# Altium PCB 110-00315-D_B1-DevKit.PcbDoc (part 5 of 9)
Units mil, origin at the board's own origin, x right, y up, seen from the top; angles counter-clockwise.
Board outline 5199.57 x 2702 mil, 8 copper layers (Top Layer, Layer 2-GND-Plane, Layer 3, Layer 4, Layer 5, Layer 6, Layer 7-PWR-Plane, Bottom Layer), stack 60.866 mil thick; 418 components, 298 nets, 1591 pads, 1631 vias.
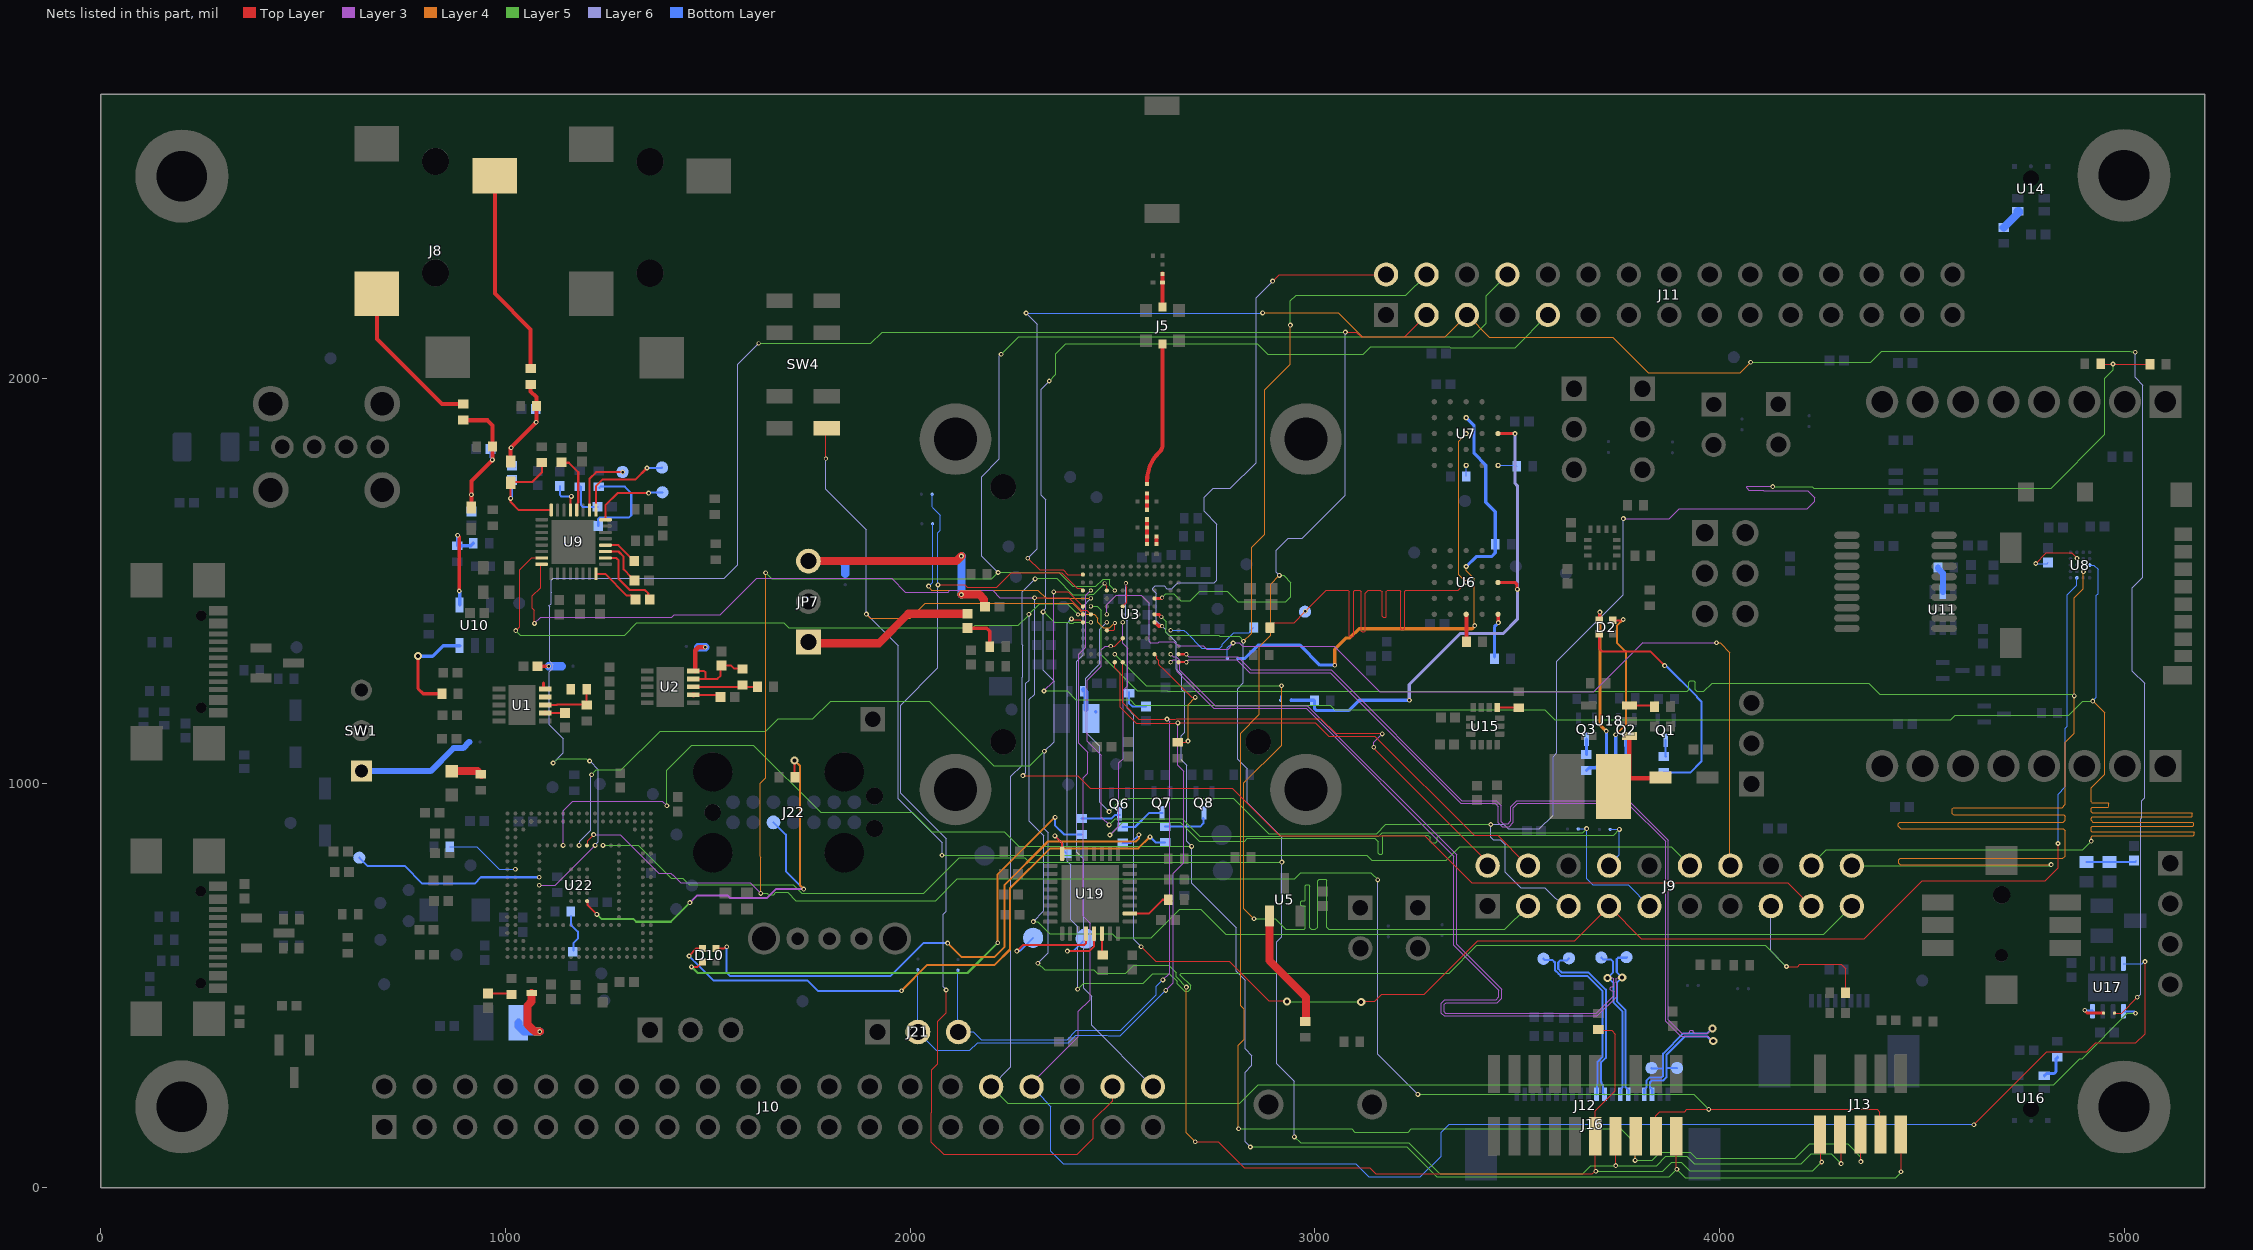
[diagram p10: the nets of this part, all layers, seen from the top]

## Via types
v1: diameter 20, hole 10, Top Layer to Bottom Layer, tented both sides, 773 vias
v2: diameter 12, hole 6, Top Layer to Bottom Layer, tented both sides, 549 vias
v3: diameter 12, hole 6, Top Layer to Bottom Layer, 194 vias
v4: diameter 10, hole 6, Top Layer to Bottom Layer, 101 vias
v5: diameter 10, hole 6, Top Layer to Bottom Layer, tented both sides, 10 vias
v6: diameter 15, hole 8, Top Layer to Bottom Layer, 4 vias

## Nets (pads, with @x,y where several pads share a name; then routed paths per layer and width w, separated by ;. In a path a pad name is that pad's centre, name@x,y a point inside that pad or via, vN(x,y) a via of type N, cw(c..) or ccw(c..) an arc to the next point about the centre after c; other vN are vias at no path point) (continued)
LINE_IN_R: C72.1 C74.2 R45.1 U9.24 | length 316.5
  Top Layer w5: C74.2@1007.58,1742.8 1012.58,1737.8 v2(1012.58,1703.8) 1012.58,1694.8 1032.63,1674.74 U9.24@1112.89,1674.74 ; C74.2@1011.58,1744.8 1066.58,1744.8 1089.58,1767.8 R45.1@1089.58,1792.11
  Bottom Layer w5: v2@1011.58,1704.8 1011.68,1704.8 1015.58,1708.69 C72.1@1015.58,1749.08
LINE_OUT_FB: TP31.1 U9.17 | length 239.3
  Top Layer w5: U9.17@1223.12,1674.74 1223.12,1733.34 1240.58,1750.8 1321.58,1750.8 v2(1349.58,1778.8)
  Bottom Layer w5: v2@1351.58,1778.8 1352.08,1779.3 1386.08,1779.3 TP31.1@1386.58,1779.8
LINE_OUT_L: TP30.1 U9.16 | length 190.9
  Top Layer w5: U9.16@1246.74,1651.12 1246.74,1686.96 1276.58,1716.8 v2(1353.58,1716.8)
  Bottom Layer w5: v2@1352.58,1716.8 1353.58,1717.8 1386.58,1717.8 TP30.1@1387.58,1718.8
LINE_OUT_R: TP29.1 U9.18 | length 166.8
  Top Layer w5: U9.18@1207.37,1674.74 1207.37,1752.59 1223.58,1768.8 v2(1289.58,1768.8)
LINEIN_L: J8.2 R42.1 | length 360.1
  Top Layer w10: J8.2@682.58,2178.8 682.58,2097.75 843.33,1937 R42.1@895,1937
LINEIN_R: J8.3 R43.1 | length 507.7
  Top Layer w10: J8.3@973.58,2495.8 973.58,2209.8 1062,2121.37 R43.1@1062,2024.69
MIPI_DSI_0_N: J16.18 TP34.1 U3.A13 | length 2386.9
  Top Layer w5: U3.A13@2663.06,1298.95 U3.A13@2663.06,1298.95 2682.5,1298.87 v5(2682.58,1298.8)
  Layer 3 w3: v5(2682.58,1298.8) 2688.92,1305.14 2806.41,1305.14 2838.75,1272.8 3037.58,1272.8 3360.58,949.8 3445.53,949.8 3453.53,941.8 3453.53,901.8 3462.63,892.7 3480.43,892.7 3490.53,902.8 3490.53,938.8 3501.53,949.8 3772.58,949.8 3866.58,855.8 3866.58,411.9 3903.68,374.8 3971.58,374.8 3983.58,362.8 v1(3984.58,362.8)
  Bottom Layer w5: J16.18@3833.59,242 3828.25,247.34 3828.25,260.28 3832.77,264.8 3860.38,264.8 3868.58,273 ; TP34.1@3895,296 3894.8,295.8 3869.58,295.8 3869.58,274 3868.58,273 ; v1@3980.79,362.8 3969.79,373.8 3914.16,373.8 3868.58,328.21 3868.58,273
  Bottom Layer w6: J16.18@3833.59,231 J16.18@3833.59,242 ; v1@3980.79,362.8 v1(3984.58,362.8)
MIPI_DSI_0_P: J16.17 TP35.1 U3.A12 | length 2386
  Top Layer w5: U3.A12@2663.06,1318.63 U3.A12@2663.06,1318.63 2682.5,1318.56 v5(2682.58,1318.48)
  Layer 3 w3: v5(2682.58,1318.48) 2688.92,1312.14 2809.31,1312.14 2841.65,1279.8 3040.48,1279.8 3363.48,956.8 3448.43,956.8 3460.53,944.7 3460.53,904.8 ; 3460.53,904.7 3465.53,899.7 3477.53,899.7 3483.09,905.25 ; 3483.53,905.7 3483.53,941.7 3498.63,956.8 3775.48,956.8 3873.58,858.7 3873.58,414.8 3906.58,381.8 3925.53,381.8 ; 3925.53,382.8 3926.53,383.8 3926.53,387.04 3928.29,388.8 3933.53,388.8 3935.53,386.8 3935.53,383.8 3937.53,381.8 3971.58,381.8 3982.58,392.8 v1(3982.58,393.8)
  Bottom Layer w5: J16.17@3813.91,242 3819.25,247.34 3819.25,264.01 3828.04,272.8 3857.06,272.8 3860.58,276.31 3860.58,294.8 ; TP35.1@3832,296 3833.21,294.8 3860.58,294.8 ; v1@3981.58,393.8 3969.58,381.8 3910.85,381.8 3860.58,331.52 3860.58,294.8
  Bottom Layer w6: J16.17@3813.91,231 J16.17@3813.91,242
MIPI_DSI_1_N: J16.12 TP38.1 | length 452.5
  Bottom Layer w5: TP38.1@3628,567 3623.22,562.22 3606.95,562.22 3601.53,556.8 3601.53,541.04 3608.19,534.38 3610.77,531.8 3676.6,531.8 3719,489.4 3719,321.02 3706.64,308.66 3706.64,262.61 3708.14,261.11 3708.14,257.8 3711.98,253.95 3711.98,234.5 J16.12@3715.48,231
MIPI_DSI_1_P: J16.11 TP39.1 | length 451.6
  Bottom Layer w5: TP39.1@3565,566 3568.18,562.82 3587.5,562.82 3593.53,556.8 3593.53,537.73 3602.53,528.73 3607.46,523.8 3673.29,523.8 3711,486.09 3711,324.33 3698.64,311.98 3698.64,256.3 3697.85,255.5 3697.85,233.05 J16.11@3695.8,231
MIPI_DSI_C_N: J16.15 TP36.1 U3.B13 | length 2386
  Layer 3 w3: v4(2643.37,1298.95) 2649.72,1305.29 2654.58,1305.29 2659.58,1300.29 2659.58,1275.9 2750.68,1184.8 2978.58,1184.8 3343.53,819.84 3343.53,598.94 3454.63,487.85 3454.63,471.75 3447.68,464.8 3321.29,464.8 3312.58,456.08 3312.58,431.9 3319.68,424.8 3698.48,424.8 3745.58,471.9 3745.58,506.7 3745.08,507.2 3745.08,517.54 3746.84,519.3 3759.08,519.3 v1(3759.58,519.8)
  Bottom Layer w5: TP36.1@3771.58,569.8 3770.25,568.47 3749.59,568.47 3746.08,564.96 3746.08,532.8 3759.08,519.8 v1(3759.58,519.8) 3746.58,506.8 3746.58,460.73 3768.2,439.11 3768.2,248.34 3774.54,242 J16.15@3774.54,231
MIPI_DSI_C_P: J16.14 TP37.1 U3.B12 | length 2386.1
  Layer 3 w3: v4(2643.37,1318.63) 2649.72,1312.29 2657.48,1312.29 2666.58,1303.19 2666.58,1278.8 2753.58,1191.8 2981.48,1191.8 3350.53,822.74 3350.53,601.84 3461.63,490.75 3461.63,468.85 3450.58,457.8 3324.19,457.8 3319.58,453.18 3319.58,434.8 3322.58,431.8 3695.58,431.8 3738.58,474.8 3738.58,484.8 3736.58,486.8 3733.58,486.8 3730.58,489.8 3730.58,494.8 3732.58,496.8 3736.58,496.8 3738.58,498.8 3738.58,503.8 3738.08,504.3 3738.08,517.54 3736.32,519.3 3724.08,519.3 v1(3723.58,518.8)
  Bottom Layer w5: TP37.1@3708,569 3712.6,564.41 3731.47,564.41 3737.08,558.8 3737.08,532.8 3723.58,519.3 v1(3723.58,518.8) 3725.58,518.8 3737.58,506.8 3737.58,458.41 3760.2,435.8 3760.2,247.34 3754.85,242 J16.14@3754.85,231
NetC4_2: C4.2 R1.2 S1.1 U1.9 U1.10 | length 80
  Top Layer w8: C4.2@1079.3,1288.8 1105.58,1288.8 v2@1106.58,1289.8 ; 1093.58,1247.8 1093.58,1234.28 1095.48,1232.37 U1.10@1098.09,1232.37
  Bottom Layer w8: S1.1@1139.8,1288.8 S1.1@1140,1289
  Bottom Layer w20: v2(1106.58,1288.8) S1.1@1139.8,1288.8
NetC5_2: C5.2 U1.7 | length 49.7
  Top Layer w5: U1.7@1098.19,1173.22 C5.2@1147.15,1173.22
  Top Layer w12: U1.7@1098.09,1173.32 U1.7@1098.19,1173.22 ; C5.2@1147.15,1173.22 C5.2@1147.58,1172.8
NetC10_2: C10.2 R3.2 S2.1 U2.9 U2.10 | length 303.3
  Top Layer w5: U2.9@1464.09,1257.69 1493.78,1257.69 ; U2.10@1468.48,1277.37 1490.23,1277.37 1493.5,1274.1 1493.5,1257.97 1493.78,1257.69 ; C10.2@1531.58,1289.8 1531.58,1265.8 1523.47,1257.69 1493.78,1257.69 ; C10.2@1533.58,1290.36 1557.24,1290.36 1564.12,1283.48 R3.2@1585.5,1283.48
  Top Layer w12: U2.10@1468.48,1277.37 1468.58,1277.47 1468.58,1327.8 1476.58,1335.8 v2(1493.58,1335.8) ; C10.2@1528.58,1294.8 1531.58,1291.8 C10.2@1531.58,1289.8 ; C10.2@1529.58,1289.8 C10.2@1531.58,1289.8 ; C10.2@1534.15,1289.8 C10.2@1531.58,1289.8
  Bottom Layer w12: S2.1@1473.3,1338 S2.1@1475.51,1335.8
  Bottom Layer w20: S2.1@1475.51,1335.8 v2(1493.58,1335.8)
NetC11_2: C11.2 U2.7 | length 60.5
  Top Layer w5: U2.7@1464.19,1218.22 1521.15,1218.22 C11.2@1523.58,1215.8
  Top Layer w12: U2.7@1464.09,1218.32 U2.7@1464.19,1218.22
NetC31_2: C31.2 R22.1 | length 72.4
  Bottom Layer w5: R22.1@2540.53,1224.8 2540.53,1197.8 2548.82,1189.51 C31.2@2582.53,1189.51
NetC32_1: C32.1 JP7.1 | length 413.9
  Top Layer w20: JP7.1@1755.58,1345.8 1922.53,1345.8 1995.25,1418.51 C32.1@2139.33,1418.51
NetC32_2: C32.2 R23.1 | length 97.3
  Top Layer w8: C32.2@2141.53,1383.08 2189.53,1383.08 2196.85,1375.77 R23.1@2196.85,1336.8
NetC33_1: C33.1 JP7.3 SH7.1 | length 672.8
  Top Layer w20: JP7.3@1757.53,1555.8 1764.53,1548.8 2114.15,1548.8 v2(2126.34,1560.98) ; v2(2126.53,1465.8) 2170.89,1465.8 2182.61,1454.08 2182.61,1438 C33.1@2184.82,1435.8
  Bottom Layer w20: JP7.3@1745.53,1548.8 JP7.3@1748.58,1548.8 1830.7,1548.8 1839.53,1539.97 SH7.1@1839.53,1517.1 ; v2(2126.53,1465.8) 2126.53,1559.8 v2@2127.5,1560.77
NetC37_1: C37.1 C39.2 L3.1 R52.2 | length 57.6
  Top Layer w10: C39.2@2584.99,1631.4 2585.19,1631.2 C37.1@2585.19,1590.79 ; C39.2@2585.07,1634.82 2585.07,1647.82 2585.2,1647.95 L3.1@2585.2,1651.66
NetC38_1: C38.1 R52.1 | length 18.2
  Top Layer w10: C38.1@2608.5,1590.5 R52.1@2608.5,1608.69
NetC40_2: C40.2 L3.2 L4.1 | length 35.7
  Top Layer w10: L3.2@2585.19,1679.62 C40.2@2585.19,1696 ; C40.2@2585.3,1696.52 L4.1@2585.3,1715.8
NetC41_1: C41.1 J5.OUT L5.2 | length 83.7
  Top Layer w10: J5.OUT@2623.53,2176.47 2623.53,2236.61 2623.34,2236.8 2623.53,2236.99 L5.2@2623.53,2259.99
NetC54_2: C54.2 U8.B3 | length 149.6
  Top Layer w3: v2(4781.58,1542.8) 4807.58,1568.8 4870.58,1568.8 v2(4883.58,1555.8)
  Bottom Layer w3: v2(4781.58,1542.8) 4809.52,1542.8 C54.2@4812,1545.29
NetC56_2: C56.2 R38.2 | length 244.8
  Bottom Layer w5: C56.2@1229.03,1635.37 1229.03,1653.25 1232.58,1656.8 1305.58,1656.8 1310.58,1661.8 1310.58,1716.8 1294.58,1732.8 1234.58,1732.8 R38.2@1231.58,1729.8
NetC57_2: C57.2 R39.2 | length 88.7
  Bottom Layer w5: R39.2@1185.58,1732.8 1186.58,1731.8 1186.58,1686.8 1190.37,1683 C57.2@1227.29,1683
NetC59_1: C59.1 U9.10 | length 181.6
  Top Layer w5: U9.10@1246.74,1556.63 1273.74,1556.63 1276.56,1553.81 1278.58,1551.8 1278.58,1505.8 1307.58,1476.8 1344.58,1476.8 1352.58,1468.8 1352.58,1457.8 C59.1@1353.58,1456.8
NetC59_2: C59.2 U9.8 | length 126.3
  Top Layer w5: U9.8@1223.12,1517.26 1246.11,1517.26 1299.87,1463.5 1311.16,1463.5 C59.2@1320.86,1453.8 1321.58,1453.08 C59.2@1321.58,1451.8
NetC65_2: C65.2 U9.21 | length 89.9
  Top Layer w5: U9.21@1160.13,1674.74 1160.13,1706.35 v2(1162.58,1708.8)
  Bottom Layer w5: C65.2@1134,1734.29 1134,1712.37 1137.58,1708.8 v2(1162.58,1708.8) v2@1164.58,1710.8
NetC66_2: C66.2 U9.20 | length 142.1
  Top Layer w5: C66.2@1142.58,1791.8 1156.58,1791.8 1179.58,1768.8 1179.58,1693.8 1177.32,1691.53 1177.32,1676.18 U9.20@1175.88,1674.74
NetC67_2: C67.2 U9.11 | length 113.9
  Top Layer w5: U9.11@1246.74,1572.38 1279,1572.38 1291.58,1559.8 1291.58,1528.08 1310.58,1509.08 C67.2@1310.58,1503.8
NetC68_2: C68.2 U9.12 | length 89.7
  Top Layer w5: U9.12@1246.74,1588.13 1278.53,1588.13 C68.2@1317.86,1548.8 1318.58,1548.08 C68.2@1318.58,1546.8
NetC69_1: C69.1 C70.2 C71.2 R41.1 R42.2 | length 370.4
  Top Layer w5: C69.1@915,1681 C69.1@915.58,1681.58 ; v2@966.58,1797.8 v2@967.58,1797.8 ; R41.1@967.58,1831.58 R41.1@968,1832
  Top Layer w10: R42.2@898.58,1896.8 955.58,1896.8 968,1884.37 R41.1@968,1832 ; C69.1@915.58,1681.58 v2(915.58,1712.8) 915.58,1746.8 v2@966.58,1797.8 ; v2(967.58,1798.8) R41.1@967.58,1831.58
  Bottom Layer w5: v2(915.58,1712.8) 916,1712.37 C71.2@916,1671.72 ; C70.2@962.72,1826 962.72,1805.55 968.58,1799.69 v2@968.58,1798.8
NetC72_2: C72.2 C73.2 C74.1 R43.2 R44.1 | length 299.8
  Top Layer w5: v2(1075.58,1891.8) v2@1076.58,1892.8
  Top Layer w10: C74.1@1012.58,1795.3 1012.58,1828.8 v2(1075.58,1891.8) ; R43.2@1062,1985.32 1062,1968.37 1076.58,1953.8 R44.1@1076.58,1933.8 ; v2@1076.58,1892.8 R44.1@1076.58,1931.8
  Bottom Layer w5: v2@1013.58,1829.8 v2(1013.58,1828.8) 1013.58,1786.51 C72.2@1015.58,1784.51 ; C73.2@1074.44,1925 1075.58,1923.86 1075.58,1893.8 v2@1074.58,1892.8
NetC95_2: C95.2 R56.1 R57.1 | length 123.7
  Bottom Layer w5: R57.1@4907,805 5026.78,805 C95.2@5029.58,807.8
NetC106_2: C106.2 U19.16 | length 106.7
  Top Layer w5: v2(2357.58,869.8) 2375.68,851.69 U19.16@2375.68,825.3
  Bottom Layer w5: v2(2357.58,869.8) 2376.16,851.22 2376.16,836.5 C106.2@2385.86,826.8
NetC137_2: C137.2 R85.1 | length 96.7
  Bottom Layer w5: R85.1@1161.26,671.8 1161.26,650.11 1178.58,632.8 1178.58,615.8 1167.58,604.8 C137.2@1167.58,586.8
NetC141_2: C141.2 R86.1 | length 59.1
  Top Layer w5: C141.2@956.53,480.51 1011.82,480.51 R86.1@1014.53,477.8
NetD2_2: D2.2 R7.2 | length 599.8
  Top Layer w5: D2.2@3702.85,1369.06 3702.85,1332.53 3709.58,1325.8 3828.87,1325.8 v2(3864.22,1290.44) 3865.58,1289.09 v2@3865.58,1288.8
  Bottom Layer w5: R7.2@3862,1026.32 3887.06,1026.32 3887.58,1025.8 3927.58,1025.8 3955.58,1053.8 3955.58,1200.8 3944.79,1211.59 3944.79,1213.51 3866.5,1291.8 v2@3864.58,1291.8
NetD2_3: D2.3 R12.2 | length 448.9
  Top Layer w8: D2.3@3702.85,1402.53 3703.77,1403.45 3703.77,1422.03 v2(3704.53,1422.8)
  Layer 4 w8: v2(3704.53,1422.8) 3704.53,1144.13 v2(3720.22,1128.44)
  Bottom Layer w8: R12.2@3671,1031.32 3677.83,1038.14 3693.93,1038.14 3720.58,1064.8 v2@3720.58,1128.44
NetD2_4: D2.4 R10.1 | length 474.6
  Top Layer w5: D2.4@3736.31,1402.53 3759.31,1402.53 v2@3760.58,1403.8
  Layer 4 w5: v2(3743.22,1119.44) 3768.53,1144.75 3768.53,1324.8 3746.56,1346.77 3746.56,1388.77 v2(3762.22,1404.44)
  Bottom Layer w8: v2@3743.58,1119.8 3743.58,1052.8 3733.58,1042.8 3733.58,1025.8 3743.58,1015.8 3763.17,1015.8 R10.1@3768,1020.63
NetD6_A: D6.A R14.2 | length 77.6
  Top Layer w20: D6.A@867,1029.53 930.85,1029.53 R14.2@940.58,1019.8
NetD9_2: D9.2 L6.2 U18.1 | length 182.5
  Top Layer w8: U18.1@3777,1116.35 U18.1@3777.25,1116.6 ; D9.2@3852,1012 D9.2@3854,1014
  Top Layer w12: U18.1@3777,1116.35 3777,1012 D9.2@3852,1012
NetD10_2: D10.2 R93.2 | length 1292.4
  Top Layer w5: v2(1459.53,545.8) 1474.53,545.8 D10.2@1486.8,558.06
  Layer 5 w5: v2(1459.53,545.8) 1474.53,530.8 2141.58,530.8 v2@2216.53,605.75
  Layer 4 w5: v2(2216.22,605.44) 2216.22,774.44 2357.58,915.8 v2@2358.58,915.8
  Bottom Layer w5: v2@2356.58,915.8 2358.22,914.15 2358.22,895.15 2380.26,873.11 R93.2@2423.58,873.11
  other v2: 2358.22,915.44
NetD10_3: D10.3 R96.2 | length 1508
  Top Layer w5: v2@1453.53,573.8 1471.26,591.53 D10.3@1486.8,591.53
  Layer 4 w5: v2(1978.53,486.8) 2042.53,550.8 2208.58,550.8 2246.58,588.8 2246.58,739.8 2345.58,838.8 2564.03,838.8 v2(2592.53,867.3)
  Bottom Layer w5: v2@1452.53,575.8 1452.53,573.8 1514.53,511.8 1746.53,511.8 1771.53,486.8 v2(1978.53,486.8) ; v2(2592.53,867.3) 2606.51,853.32 R96.2@2630,853.32
  other v2: 1453.53,572.8
NetD10_4: D10.4 R94.2 | length 1435.6
  Top Layer w5: D10.4@1520.26,591.53 1540.37,591.53 1546.64,597.8 v2@1547.53,597.8
  Layer 4 w5: v2(2092.53,604.8) 2127.53,569.8 2207.58,569.8 2232.58,594.8 2232.58,747.8 2340.58,855.8 2557.58,855.8 2565.58,863.8 v2@2565.58,872.8
  Bottom Layer w5: v2(1546.53,595.8) 1546.53,531.8 1555.53,522.8 1950.24,522.8 2032.24,604.8 v2(2092.53,604.8) ; R94.2@2525,852.32 2545.3,852.32 2565.78,872.8 v2@2566.58,872.8
  other v2: 2565.22,872.44
NetJ5_IN: J5.IN L4.2 | length 356.3
  Top Layer w10: L4.2@2585.3,1739.42 2585.3,1746.48 cw(c2685.3,1746.48) 2614.59,1817.19 2617,1819.6 ccw(c2601.23,1835.37) 2623.53,1835.37 J5.IN@2623.53,2085.13
NetL1_2: L1.2 L2.1 | length 53.1
  Bottom Layer w8: L2.1@2458,1176.37 L2.1@2458.58,1175.8
  Bottom Layer w12: L1.2@2428.21,1231.47 2434.58,1225.1 L2.1@2434.58,1181.8
NetL7_2: L7.2 L8.1 | length 186
  Top Layer w20: L7.2@1064.53,481.56 1064.1,481.12 1064.1,460.23 1059.53,455.67 1059.53,454.8 1054.53,449.8 1054.53,403.8 1065.56,392.77 1072.53,385.8 v3(1084.53,385.8)
  Bottom Layer w20: L8.1@1031.45,407.8 1031.45,400.21 1045.85,385.8 v3(1084.53,385.8)
NetQ1_3: Q1.3 R7.1 | length 40.9
  Bottom Layer w5: Q1.3@3867,1106.43 3867,1066.37 R7.1@3867.58,1065.8
NetQ2_3: Q2.3 R10.2 | length 47.5
  Bottom Layer w8: R10.2@3768,1060 3769.69,1061.69 Q2.3@3769.69,1106.85
NetQ3_3: Q3.3 R12.1 | length 37.7
  Bottom Layer w8: R12.1@3671,1070.69 Q3.3@3671,1108.43
NetQ6_3: Q6.3 R93.1 | length 98.4
  Bottom Layer w5: R93.1@2423.58,912.48 2497.26,912.48 2505.58,920.8 Q6.3@2518.58,920.8
NetQ7_3: Q7.3 R94.1 | length 113.1
  Bottom Layer w5: R94.1@2525,891.69 2555.47,891.69 2590.58,926.8 Q7.3@2623.58,926.8
NetQ8_3: Q8.3 R96.1 | length 111.3
  Bottom Layer w5: R96.1@2630,892.69 2716.47,892.69 2724.58,900.8 2724.58,912.8 Q8.3@2723.58,913.8
NetR1_1: R1.1 R2.2 U1.8 | length 137.6
  Top Layer w5: U1.8@1098.09,1193 1125.78,1193 1127.58,1194.8 R2.2@1198.58,1194.8 ; R2.2@1200.37,1197.83 R1.1@1200.37,1232
  Top Layer w12: R2.2@1198.58,1196.8 1199.34,1196.8 R2.2@1200.37,1197.83
NetR3_1: R3.1 R4.2 U2.8 | length 158.6
  Top Layer w5: U2.8@1464.09,1238 R4.2@1622.69,1238
NetR16_2: R16.2 U5.1 | length 296.9
  Top Layer w20: U5.1@2888.13,671.8 2888.13,561.2 2978.53,470.8 2978.53,413.8 R16.2@2977.53,412.8
NetR27_2: R27.2 U3.B9 | length 252
  Bottom Layer w3: v4@2641.58,1377.8 2641.69,1377.69 v4(2643.37,1377.69) ; v4@2643.58,1375.8 2645.58,1377.8 2676.58,1377.8 2683.06,1371.32 ; 2682.8,1371.06 2721.06,1332.8 2765.05,1332.8 2771.7,1339.45 2771.7,1343.3 2799.59,1371.19 2837.81,1371.19 2839.57,1372.94 2839.57,1375.47 R27.2@2848.89,1384.8
NetR28_1: R28.1 U3.D12 | length 295.4
  Top Layer w3: U3.D12@2604,1318.63 2609.19,1313.45 2609.19,1307.55 2613.75,1302.99 2613.75,1293.57 2614.53,1292.8 ; 2614.76,1293.03 2627.78,1280 2695.86,1211.93 2704.45,1211.93 v2(2704.58,1211.8) ; R28.1@2661.52,1100.93 2683.71,1100.93 v2(2686.58,1103.8)
  Layer 4 w3: v2(2686.58,1103.8) 2686.58,1193.8 v2(2704.58,1211.8)
NetR46_1: R46.1 U10.3 | length 256.6
  Top Layer w8: v1@783.58,1312.8 783.58,1233.8 796.58,1220.8 R46.1@842.89,1220.8
  Bottom Layer w8: v1@784.58,1313.8 784.81,1313.56 785.43,1313.56 785.66,1313.8 819.58,1313.8 845.56,1339.77 U10.3@886.56,1339.77
  other v1: 783.57,1314.31
NetR47_2: R47.2 R48.1 U10.4 | length 242.1
  Top Layer w8: v2(881.58,1612.8) 885.58,1608.8 v2(885.58,1474.8)
  Bottom Layer w8: R48.1@880.96,1586.71 881.58,1587.32 v2(881.58,1612.8) ; R48.1@882.32,1588.06 883.67,1586.71 913.96,1586.71 R47.2@920.28,1593.02 ; v2(885.58,1474.8) 886.56,1473.81 U10.4@886.56,1440.27
NetR50_2: R50.2 U11.5 | length 65.6
  Bottom Layer w15: R50.2@4539.85,1532.8 4539.85,1530.83 4552,1518.67 U11.5@4552,1472.25
NetR53_1: R53.1 U14.1 | length 58.4
  Bottom Layer w20: R53.1@4702.53,2372.8 4739.53,2409.8 4739.53,2413.35 U14.1@4737.01,2413.35
NetR54_1: R54.1 U15.1 | length 53.7
  Top Layer w5: U15.1@3450.53,1186.87 3503.45,1186.87 R54.1@3504,1186.32
NetR55_1: R55.1 U16.1 | length 70.2
  Bottom Layer w8: U16.1@4803,276.66 4808.83,282.49 4826.89,282.49 4831.58,287.17 4831.58,318.8 R55.1@4835.58,322.8
NetR58_2: R58.2 U18.3 | length 71.9
  Top Layer w5: U18.3@3777.25,1191.4 3847.19,1191.4 R58.2@3848.58,1192.8
NetR65_2: R65.2 U19.30 | length 56.9
  Top Layer w5: U19.30@2474.11,628.3 2474.11,576.27 R65.2@2477.58,572.8
NetR66_2: R66.2 U19.2 | length 117.9
  Top Layer w5: U19.2@2543.08,677.58 2589.37,677.58 2623.58,711.8 2642.58,711.8 R66.2@2645.58,708.8
NetR90_2: R90.2 U22.V8 | length 185.1
  Bottom Layer w3: R90.2@862.22,842.8 928.53,842.8 984.24,787.09 v3(1024.24,787.09)
NetS3_1: S3.1 SW1.3 | length 299
  Bottom Layer w15: SW1.3@643.58,1035.8 649.58,1029.8 814.58,1029.8 871.3,1086.52 895,1086.52 S3.1@910.28,1101.8
NetS7_2: S7.2 U17.4 | length 69.8
  Top Layer w8: v3(4902.53,438.8) 4909.53,431.8 S7.2@4949.23,431.8
  Bottom Layer w8: v3(4902.53,438.8) 4903.07,438.8 4905.87,436 U17.4@4921.62,436
NetTP40_1: TP40.1 U19.28 | length 258.3
  Top Layer w5: v2@2261.58,582.8 v2(2263.58,584.8) 2278.58,599.8 2429.58,599.8 2434.74,604.95 U19.28@2434.74,628.3
  Bottom Layer w5: v2@2264.58,584.8 2265.92,586.14 2271.92,586.14 TP40.1@2303.58,617.8
NetTP41_1: TP41.1 U19.29 | length 160.2
  Top Layer w5: v2(2388.58,584.8) 2442.58,584.8 2454.42,596.64 U19.29@2454.42,628.3
  Bottom Layer w5: v2(2388.58,584.8) 2402.58,584.8 TP41.1@2433.58,615.8
NetTP54_1: TP54.1 U22.R9 | length 477.7
  Bottom Layer w5: TP54.1@638.53,815.8 658.53,795.8 750.53,795.8 794.53,751.8 923.53,751.8 939.14,767.41 v3(1083.3,767.41)
NSRST: J11.9 J12.10 J13.10 R51.2 U3.M8 U22.K5 | length 7319.6
  Top Layer w3: v2(2704.58,113.8) 2761.58,113.8 2825.58,49.8 3135.58,49.8 3150.58,34.8 3686.14,34.8 3691.14,39.8 v2@3695.58,39.8 ; v2(3694.58,40.8) 3693,42.37 J12.10@3693,127.46 3693,190.22 3742.58,239.8 3742.58,379.8 3733.58,388.8 R51.2@3701.58,388.8 ; J13.10@4247.58,104.8 4250.58,101.8 4250.58,57.8
  Layer 5 w3: v2(1212.53,1020.8) 1224.53,1032.8 1286.43,1032.8 1381.93,1128.3 1643.03,1128.3 1673.53,1158.8 1759.53,1158.8 1803.53,1202.8 2046.58,1202.8 2206.58,1042.8 2295.58,1042.8 v2(2331.58,1078.8) ; v2(2315.58,554.8) 2332.08,538.3 2453.85,538.3 2461.85,530.3 2532.89,530.3 2552.89,550.3 2638.53,550.3 2656.94,531.88 2656.94,521.38 v2(2682.53,495.8) ; v2(2328.58,1423.3) 2330.08,1423.3 2356,1397.37 2392.15,1397.37 2394.23,1395.3 2402.93,1395.3 2405,1397.37 v4(2446.52,1397.37) ; v2(2343.53,1993.8) 2359.8,2010.07 2359.8,2061.2 2384.4,2085.8 2857.53,2085.8 2883.53,2059.8 3119.53,2059.8 3138.53,2078.8 3332.53,2078.8 3335.53,2075.8 3494.8,2075.8 J11.9@3576,2157 3576.8,2157.8 J11.9@3587.58,2157.8 ; v2(3694.58,40.8) 3859.58,40.8 3881.58,62.8 3905.58,62.8 3926.58,41.8 4230.58,41.8 v2(4252.58,63.8)
  Layer 4 w3: v2@2682.53,496.52 2682.53,135.84 v2(2704.58,113.8)
  Layer 6 w3: v3(1181.72,846.15) 1183.38,847.8 1183.38,856.65 1210.53,883.8 1210.53,1018.8 v2(1212.53,1020.8) ; v2(2315.58,554.8) 2341.58,580.8 2341.58,876.8 2331.58,886.8 v2(2331.58,1078.8) 2355.58,1102.8 2355.58,1251.8 2328.58,1278.8 2328.58,1425.73 2334.58,1431.73 2334.58,1700.8 2323.53,1711.84 2323.53,1973.8 v2(2343.53,1993.8)
NSRST_J: J22.12 R103.2 U22.J12 | length 1160.1
  Top Layer w5: U22.J12@1201.41,708.35 1202.34,707.43 1202.34,698.99 v3(1225.53,675.8) ; R103.2@1715.22,1014.8 1714.53,1015.48 1714.53,1052.8 v1@1715.53,1053.8
  Layer 3 w5: v2(1455.53,704.8) 1472.53,721.8 1549.66,721.8 1555.37,716.09 1629.82,716.09 1629.86,716.05 1645.78,716.05 1667.9,738.17 v2@1734.9,738.17
  Layer 5 w5: v3(1225.53,675.8) 1236.53,664.8 1315.58,664.8 1322.89,657.48 1408.22,657.48 v2(1455.53,704.8)
  Layer 4 w5: v1(1714.53,1055.8) 1727.53,1042.8 1727.53,747.89 1736.9,738.52 v2(1736.9,738.17)
  Bottom Layer w5: J22.12@1662,903 1692.53,872.47 1692.53,782.53 v2(1736.9,738.17)
OS0_SS0: R33.2 S4.2 U6.A3 U7.A3 | length 1260.9
  Top Layer w8: U7.A3@3452.72,1863.88 v3(3494.61,1863.88) ; U6.A3@3452.74,1496 3493.88,1496 3499.77,1490.11 3499.77,1479.56 v3(3500.53,1478.8)
  Layer 6 w8: v2(3233.53,1204.8) 3233.53,1243.8 3359.53,1369.8 3465.53,1369.8 3500.53,1404.8 v3(3500.53,1478.8) 3500.53,1734.95 3494.61,1740.88 v3(3494.61,1863.88)
  Bottom Layer w8: S4.2@2941.88,1204.8 2997.89,1204.8 R33.2@2998.89,1203.8 2998.89,1184.48 3003.58,1179.8 3084.58,1179.8 3109.58,1204.8 v2(3233.53,1204.8)
OS0_SS1: R34.2 S5.2 U6.C2 U7.C2 | length 1290.8
  Layer 4 w3: v3@3372.53,1904.8 3372.53,1904.69 v3(3373.98,1903.25) ; v3(3374,1535.37) 3374.46,1534.92 3374.46,1524.87 3394.53,1504.8 3394.53,1390.13 v2(3395.22,1389.44)
  Layer 4 w8: v2(3049.22,1291.44) 3049.22,1330.49 3077.53,1358.8 3086.53,1358.8 3109.53,1381.8 3388.58,1381.8 v2@3395.72,1388.94
  Bottom Layer w8: S5.2@2810.3,1308 2826.78,1308 2859.58,1340.8 2963.58,1340.8 3012.58,1291.8 v2@3049.58,1291.8 ; v3(3374,1535.37) 3398.43,1559.8 3436.53,1559.8 3445.85,1569.11 R34.2@3445.85,1590.8 3445.85,1670.48 3422.53,1693.8 3422.53,1785.8 3393.53,1814.8 3393.53,1883.69 3374.53,1902.69 v3@3374.53,1904.8
OSPI0_DS: R37.2 TP25.1 U6.C3 U7.C3 | length 1644.6
  Top Layer w3: R37.2@2890.53,1387.8 2891.25,1387.8 2900.25,1396.8 2948.58,1396.8 v2(2976.58,1424.8) 3028.58,1476.8 3081.53,1476.8 3084.53,1473.8 3084.53,1364.8 3087.53,1361.8 3092.53,1361.8 3095.53,1364.8 3095.53,1473.8 3098.53,1476.8 3110.53,1476.8 3114.53,1472.8 3114.53,1375.8 3115.54,1374.79 3116.53,1373.8 3122.53,1373.8 3124.53,1375.8 3124.53,1469.8 3131.53,1476.8 3162.2,1476.8 3166,1473 3166,1413 3169,1410 3175.24,1410 3177,1411.76 3177,1473.8 3180,1476.8 3209.2,1476.8 3212,1474 3212,1382 3215,1379 3218,1379 3222,1383 3222,1432 ; 3222,1433 3222,1473.8 3225,1476.8 3354.8,1476.8 v3(3374,1496) ; U6.C3@3374,1493.8 U6.C3@3374.58,1493.8
  Layer 4 w3: v3@3372.9,1862.8 3355.53,1845.43 3355.53,1514.47 v3(3374,1496)
  other v3: 3373.98,1863.88
OSPI0_H_INTn: R36.1 U7.A5 | length 47.1
  Bottom Layer w3: v3(3452.72,1785.14) 3496.67,1785.14 R36.1@3498.93,1782.88
OSPI0_H_WP: R35.1 U7.C5 | length 27.4
  Bottom Layer w3: v3(3373.98,1785.14) 3373.98,1758.19 R35.1@3374.3,1757.88
OSPI0_INTn: R32.1 U6.A5 | length 110.1
  Top Layer w8: U6.A5@3452.74,1417.26 3453.14,1416.87 3453.14,1397.19 v3(3453.53,1396.8)
  Bottom Layer w8: R32.1@3443.85,1311.48 3443.85,1386.03 3453.53,1395.71 v3(3453.53,1396.8)
OSPI0_WP: R31.1 U6.C5 | length 72.4
  Top Layer w10: R31.1@3372.58,1345.8 3374.45,1347.67 3374.45,1416.82 U6.C5@3374,1417.26
P0_0: J9.2 J21.3 S16.2 U3.H13 | length 2605
  Top Layer w3: U3.H13@2525.26,1298.95 2525.26,1198.11 2565.08,1158.3 v2(2634.58,1158.3) ; v2@2634.58,1157.8 2635.04,1157.34 2655.27,1157.34 2657.23,1159.3 3015.08,1159.3 3051.58,1122.8 3165.58,1122.8 v2(3166.58,1121.8) ; v2(3145.58,1088.8) 3145.58,1086.36 3427.14,804.8 J9.2@3427.58,804.8
  Layer 3 w3: v2(2624.58,513.8) 2641.58,530.8 2641.58,1151.3 v2(2634.58,1158.3) ; v2(3145.58,1088.8) 3145.58,1100.8 v2(3166.58,1121.8)
  Bottom Layer w3: J21.3@2116.58,392.8 2118,394.22 S16.2@2118,537.7 ; J21.3@2119,385 2156.33,385 2175.53,365.8 2387.52,365.8 2410.52,388.8 2520.53,388.8 2608.53,476.8 2608.53,497.75 v2(2624.58,513.8)
P0_1: J9.4 J21.2 S17.2 U3.J13 | length 2820
  Top Layer w3: U3.J13@2505.58,1298.95 2505.58,1284.8 2519.26,1271.11 2519.26,1187.11 2558.58,1147.8 2660.58,1147.8 v2(2661.58,1148.8) 3001.58,1148.8 3034.58,1115.8 3148.58,1115.8 3393.58,870.8 3452.21,870.8 3519.21,803.8 J9.4@3528.58,803.8
  Layer 3 w3: v2(2631.58,487.8) 2650.58,506.8 2650.58,776.8 2676.58,802.8 2676.58,1028.8 2661.58,1043.8 v2(2661.58,1148.8)
  Bottom Layer w3: S17.2@2019,538.7 J21.2@2019,385 2064.21,339.8 2147.53,339.8 2166.53,358.8 2390.76,358.8 2409.02,377.05 2487.32,377.05 2489.08,375.3 2519.08,375.3 v2(2631.58,487.8)
P0_2: J9.3 S4.1 U3.J12 | length 2293.6
  Layer 5 w3: v4(2505.58,1318.63) 2583.41,1240.8 v2(2917.58,1240.8) ; v2(2849.53,664.8) 2902.58,664.8 2928.58,638.8 2973.53,638.8 2976.53,641.8 2976.53,694.8 2974.53,696.8 2967.53,696.8 2966.54,697.79 2965.53,698.8 2965.53,706.8 2967.53,708.8 2974.53,708.8 2976.53,710.8 2976.53,746.8 2978.53,748.8 2984.53,748.8 2987.53,745.8 2987.53,642.8 2991.53,638.8 3001.58,638.8 3006.58,643.8 3006.58,758.8 3010.58,762.8 3026.58,762.8 3029.58,759.8 3029.58,643.8 3034.58,638.8 3469.8,638.8 3525.58,694.58 J9.3@3525.58,702.8
  Layer 4 w3: v2(2849.53,664.8) 2824.53,689.8 2824.53,1000.75 2917.58,1093.8 v2(2917.58,1240.8)
  Bottom Layer w3: S4.1@2915.28,1204.8 2916.21,1205.73 2916.21,1216.11 2917.58,1217.48 v2(2917.58,1240.8) v2@2917.58,1241.8
P0_3: J9.5 R75.1 R76.1 U3.K8 | length 4755.9
  Top Layer w3: v2@4132.58,1730.8 v2@4134.58,1732.8 ; R76.1@4942.22,2036.8 4944.22,2034.8 R75.1@5063.85,2034.8
  Layer 3 w3: v2(3762.53,1653.8) 3876.09,1653.8 3900.09,1677.8 4216.43,1677.8 4235.08,1696.45 4235.08,1705.15 4217.93,1722.3 4109.52,1722.3 4108.02,1723.8 4072.53,1723.8 4066.77,1729.55 4066.77,1732.04 4068.53,1733.8 4130.58,1733.8 v2(4131.58,1732.8)
  Layer 5 w3: v2(2491.58,929.8) 2524.58,962.8 2798.53,962.8 2886.03,875.3 3153.29,875.3 3175.79,897.8 v2(3434.53,897.8) ; v2(4131.58,1732.8) 4229.53,1732.8 4233.53,1728.8 4819.53,1728.8 4952.53,1861.8 4952.53,2001.19 4972.53,2021.19 v3(4972.53,2035.8)
  Layer 6 w3: v4(2485.89,1397.37) 2468.58,1380.06 2468.58,1295.31 2459.58,1286.31 2459.58,1285.8 2433.58,1259.8 2433.58,1126.28 2468.58,1091.28 2468.58,952.8 v2(2491.58,929.8) ; J9.5@3627,696 3593.63,715.96 3567.79,741.8 3508.53,741.8 3470.53,779.8 3470.53,847.66 3458.46,859.73 3440.6,859.73 3434.53,865.8 v2(3434.53,897.8) 3467.28,897.8 3478.08,887 3554.73,887 3588.58,920.84 3588.58,1065.8 3597.58,1074.8 3597.58,1300.99 3762.53,1465.95 v2(3762.53,1653.8)
P0_4: J9.7 U3.H6 U8.E3 | length 4242
  Top Layer w3: U3.H6@2525.26,1436.74 2535.01,1446.49 2535.01,1483.26 2533.51,1484.76 2533.51,1493.8 v4(2533.05,1494.26) ; v2(2570.58,595.8) 2606.58,559.8 2788.58,559.8 2886.58,461.8 v1@2931.53,461.8 ; v1@3116.53,454.8 3116.53,455.42 3122.41,461.3 3148.03,461.3 3165.53,478.8 3270.53,478.8 3402.53,610.8 3641.8,610.8 J9.7@3727,696 3807.21,615.8 4357.58,615.8 4500.58,758.8 4804.58,758.8 4836.58,790.8 v2(4836.58,850.8)
  Layer 5 w3: v1(2931.56,459.87) 2932.06,459.37 3108.96,459.37 v1@3114.53,453.8
  Layer 6 w3: v4(2533.05,1494.26) 2533.05,1404.44 2535.76,1401.72 2535.76,1184.61 2552.58,1167.8 2552.58,613.8 v2(2570.58,595.8)
  Bottom Layer w3: v2(4836.58,850.8) 4836.58,972.8 4854.58,990.8 4854.58,1135.8 4859.58,1140.8 4859.58,1465.8 4883.26,1489.47 U8.E3@4883.26,1507.51 4883.26,1508.12 U8.E3@4882.58,1508.8
  other v1: 3114.56,458.87
P0_5: J9.9 S8.2 U3.H10 | length 2081.9
  Top Layer w3: v4(2495.58,1338.8) 2506.06,1338.8 U3.H10@2525.26,1358
  Layer 3 w3: v2(2491.58,896.8) 2472.58,915.8 2472.58,1068.8 2437.58,1103.8 2437.58,1253.8 2472.58,1288.8 2472.58,1329.8 2481.58,1338.8 v4(2495.58,1338.8)
  Layer 5 w3: v2@2491.58,897.8 v2(2491.58,896.8) 2506.58,911.8 2672.58,911.8 2715.58,868.8 2830.24,868.8 2830.74,869.3 3150.81,869.3 3151.31,868.8 3158.09,868.8 3167.09,877.8 3661.58,877.8 v2(3671.58,887.8)
  Bottom Layer w3: S8.2@3650.88,886.8 3668.58,886.8 v2@3670.58,888.8 ; v2(3671.58,887.8) 3671.58,763.8 3686.58,748.8 3774.21,748.8 J9.9@3827,696 3831.21,691.8 J9.9@3831.58,691.8
P0_6: J9.8 S9.2 U3.H8 | length 2082.1
  Layer 3 w3: v2(2493.58,871.8) 2515.58,893.8 2515.58,1049.8 2526.58,1060.8 2526.58,1229.3 2537.58,1240.3 2537.58,1332.8 2525.26,1345.11 v4(2525.26,1397.37)
  Layer 5 w3: v2(2493.58,871.8) 2525.58,903.8 2667.58,903.8 2714.58,856.8 2826.73,856.8 2833.23,863.3 3148.32,863.3 3156.58,855.04 3156.58,826.8 ; 3156.53,826.8 3158.53,824.8 3165.53,824.8 3167.53,826.8 ; 3167.58,826.8 3167.58,869.8 3169.58,871.8 3279.53,871.8 3285.53,865.8 3285.53,855.8 3288.53,852.8 3298.53,852.8 3302.53,856.8 3302.53,865.8 3308.53,871.8 3738.58,871.8 v2(3752.58,885.8) v2@3754.58,885.8
  Bottom Layer w3: J9.8@3727,796 3727,797.09 3752.58,822.66 3752.58,884.8 v2@3751.58,885.8 ; S9.2@3729.88,885.8 v2@3751.58,885.8 ; v2@3750.58,886.8 v2@3751.58,885.8 ; v2@3754.58,885.8 v2(3752.58,885.8) v2@3751.58,885.8
P0_7: J11.8 J12.4 J13.4 U3.J4 U22.J5 | length 7728
  Top Layer w3: U22.J5@1201.41,846.15 1202.72,847.46 1202.72,857.98 1216.53,871.8 v3@1218.53,871.8 ; J12.4@3843,127.46 3843,178.22 3852.58,187.8 3913.58,187.8 3919.58,193.8 v2(3973.58,193.8) 4389.58,193.8 4396.58,186.8 4396.58,133.43 J13.4@4398,132 J13.4@4399.58,130.43
  Layer 3 w3: v3(1217.53,872.8) 1283.53,872.8 1379.03,777.3 1408.73,777.3 1412.38,773.65 ; 1412.53,773.8 1432.53,753.8 1604.51,753.8 v2(1630.76,727.55)
  Layer 5 w3: v2(1630.76,727.55) 1646.59,727.55 1649.35,724.8 1662.75,724.8 1667.75,729.8 1697.53,729.8 1717.53,709.8 2062.53,709.8 2116.53,763.8 2950.58,763.8 2965.58,778.8 3138.58,778.8 v2@3157.58,759.8 ; v2(1642.58,1519.8) 1657.58,1504.8 2201.58,1504.8 2217.58,1520.8 2367.58,1520.8 2402.08,1486.3 2459.03,1486.3 2477.03,1504.3 2491.32,1504.3 2493.08,1502.54 2493.08,1488.61 v4(2505.58,1476.11) ; v2(2224.58,2059.8) 2268.58,2103.8 3390.58,2103.8 3423.58,2136.8 3423.58,2204.58 3468.58,2249.58 J11.8@3468.58,2260.8 ; v2(3254.58,230.8) 3936.58,230.8 v2(3973.58,193.8)
  Layer 4 w3: v2(1630.76,727.55) 1630.76,817.07 1629.03,818.79 1629.03,1000.27 1642.58,1013.8 v2(1642.58,1519.8)
  Layer 6 w3: v2(2217.33,1520.55) 2176.58,1561.3 2176.58,1757.8 2220.58,1801.8 2220.58,2056.8 v2@2226.58,2062.8 ; v2(3155.58,760.8) 3155.58,329.8 v2(3254.58,230.8)
P1_0: J11.2 J12.2 J13.2 U3.D8 U22.M5 | length 6546.8
  Top Layer w3: v2(2895.58,2240.8) 2911.78,2257 3157.37,2257 J11.2@3173.58,2240.8 ; J12.2@3893,127.46 3893,49.37 v2@3898.58,43.8 ; J13.2@4448,132 4448.58,131.43 v2(4448.58,39.8)
  Top Layer w8: U3.D8@2604,1397.37 2604.27,1397.37 2613.85,1387.8 v4(2622.58,1387.8)
  Layer 3 w3: v3(1142.35,846.15) 1142.35,931.62 1166.53,955.8 1387.53,955.8 1398.53,944.8 v2(1398.53,944.3)
  Layer 5 w3: v2(1398.53,944.3) 1398.53,1031.8 1460.53,1093.8 1612.53,1093.8 1778.53,927.8 2005.53,927.8 2011.53,921.8 2053.58,879.8 2232.58,879.8 2268.58,843.8 v2(2695.58,843.8) ; v2(2840.58,100.8) 3227.58,100.8 3301.58,26.8 3875.58,26.8 v2(3894.58,45.8) 3915.58,24.8 4435.58,24.8 4448.58,37.8 v2(4448.58,39.8)
  Layer 6 w3: 2660.89,1495.11 2646.58,1480.8 2634.58,1480.8 2627.58,1487.8 2605.58,1487.8 2601.58,1483.8 2601.34,1483.8 2599.58,1482.04 2599.58,1477.8 2608.58,1468.8 2608.58,1401.8 v4(2622.58,1387.8) 2630.94,1379.44 2630.94,1374.44 2657.58,1347.8 2657.58,1281.8 2671.58,1267.8 2671.58,1230.8 2678.58,1223.8 2678.58,1125.8 2669.58,1116.8 2669.58,1057.8 2683.58,1043.8 2683.58,855.8 v2(2695.58,843.8) 2695.58,752.8 2805.58,642.8 2805.58,534.8 2827.53,512.84 2827.53,343.33 2844.08,326.78 2844.08,302.45 2827.53,285.9 2827.53,113.84 v2(2840.58,100.8) ; 2661,1495 2751,1495 2758,1502 2758,1640 2726.58,1671.42 2726.58,1706.8 2748.58,1728.8 2791.09,1728.8 2854.58,1792.28 2854.58,2199.8 v2(2895.58,2240.8)
P1_1: J11.4 J12.8 J13.8 U3.D7 U22.G5 | length 6169.8
  Top Layer w3: J12.8@3743,127.46 3743,55.37 v2(3743.58,54.8) ; J13.8@4298,132 4300.58,129.43 v2(4300.58,59.8) v2@4301.58,58.8
  Top Layer w8: U3.D7@2604,1417.06 2604.2,1416.87 2614.51,1416.87 v4(2620.58,1410.8)
  Layer 5 w3: v3@1242.18,846.15 1328.18,846.15 1409.53,764.8 1437.53,764.8 1453.53,748.8 1711.42,748.8 1732.55,727.67 2033.45,727.67 2121.58,815.8 2283.58,815.8 2294.58,804.8 v2(2918.58,804.8) ; v4(2620.58,1410.8) 2632.58,1398.8 2632.58,1392.65 2633.08,1392.15 2633.08,1383.22 2631.58,1381.72 2631.58,1372.8 2638.58,1365.8 2762.58,1365.8 2765.58,1362.8 2812.58,1362.8 2823.58,1351.8 v2(2823.58,1350.8) ; v2(2939.53,2131.8) 2939.53,2191.75 2953.58,2205.8 3224.8,2205.8 J11.4@3276,2257 3278.58,2259.58 J11.4@3278.58,2260.8 ; v2(2949.58,125.8) 2964.58,110.8 3232.58,110.8 3308.58,34.8 3661.58,34.8 3681.58,54.8 3739.58,54.8 v2@3742.58,57.8 ; v2(3743.58,54.8) 3844.58,54.8 3867.58,77.8 3919.58,77.8 3937.58,59.8 4202.58,59.8 4226.58,83.8 4276.58,83.8 v2(4300.58,59.8)
  Layer 4 w3: v2(2823.58,1350.8) 2843.58,1370.8 2843.58,1582.8 2875.58,1614.8 2875.58,1971.8 2939.53,2035.75 v2(2939.53,2131.8)
  Layer 6 w3: v2(2823.58,1350.8) 2823.58,1247.8 2809.58,1233.8 2809.58,1058.8 2832.53,1035.84 2832.53,1013.74 2832.58,1013.7 2832.58,951.8 2918.58,865.8 v2(2918.58,804.8) 2918.58,620.8 2905.58,607.8 2905.58,306.8 2949.58,262.8 v2(2949.58,125.8)
  other v3: 1240.78,846.15
P1_2: J11.3 J12.6 J13.6 U3.D5 U22.H5 U22.R10 | length 8064.8
  Top Layer w3: v2(3075.58,2114.8) 3102.58,2114.8 3114.58,2102.8 3221.8,2102.8 J11.3@3276,2157 3278.8,2159.8 J11.3@3279.58,2159.8 ; v2@3790.58,67.8 3791.58,68.8 3791.58,126.03 J12.6@3793,127.46 ; J13.6@4348,132 4349.58,130.43 v2@4349.58,65.8
  Top Layer w8: U3.D5@2604,1456.43 2604.2,1456.62 2619.82,1456.62 2621.5,1458.3 v4(2622.58,1458.3)
  Layer 3 w3: v3(1083.3,747.72) 1122.67,747.72 v3(1221.09,846.15)
  Layer 5 w3: v2(1117.53,1049.8) 1128.53,1060.8 1199.1,1060.8 1205.1,1054.8 v2(1207.53,1054.8) ; v4(1625.53,2086.8) 1902.58,2086.8 1930.58,2114.8 v2(3075.58,2114.8) ; v4(2622.58,1458.3) 2632.08,1467.8 2651.58,1467.8 2668.58,1450.8 2692.58,1450.8 2715.58,1473.8 2783.36,1473.8 2809.36,1447.8 2928.24,1447.8 2940.53,1460.08 2940.53,1495.8 2923.03,1513.3 v2(2912.53,1513.3) ; v2(2811.58,145.8) 3090.58,145.8 3098.58,137.8 3230.58,137.8 3238.58,145.8 3755.58,145.8 3791.58,109.8 v2(3791.58,67.8) 3833.58,67.8 3853.58,87.8 3927.58,87.8 3942.58,72.8 4187.58,72.8 4223.58,108.8 4316.58,108.8 4349.58,75.8 v2(4349.58,64.8)
  Layer 4 w3: v2(2811.58,145.8) 2810.58,146.8 2810.58,351.8 2825.58,366.8 2825.58,440.8 2816.58,449.8 2816.58,1123.8 2862.72,1169.94 2862.72,1337.44 2890.54,1365.26 2890.54,1491.3 v2(2912.53,1513.3)
  Layer 6 w3: v2(1117.53,1049.8) 1142.32,1074.58 1142.32,1109.47 1107.58,1144.21 1107.58,1274.95 1117.08,1284.45 1117.08,1293.15 1109.08,1301.15 1109.08,1435.95 1107.24,1437.8 1113.38,1443.95 1113.38,1470.95 1112.73,1471.6 1112.73,1501.36 1118.17,1506.8 1540.53,1506.8 1573.53,1539.8 1573.53,2034.8 v4(1625.53,2086.8) ; v2(1207.53,1054.8) 1229.53,1032.8 1229.53,854.58 v3(1221.09,846.15) ; v2(2912.53,1513.3) 2904.53,1521.3 2904.53,1575.6 2933.73,1604.8 2968.53,1604.8 ; 2968.56,1604.77 3075.58,1711.8 v2(3075.58,2114.8)
P1_3: J11.5 S7.1 U3.N2 | length 5361.3
  Top Layer w3: v2(2290.58,1555.8) 2319.58,1526.8 2378.58,1526.8 2389.89,1515.48 U3.N2@2426.84,1515.48 ; S7.1@4975.83,431.8 4993.53,431.8 v2(5032.53,470.8)
  Layer 5 w3: v2(4076.84,2040.18) 4076.84,2041.11 4077.53,2041.8 4079.15,2040.18 4373.92,2040.18 4401.53,2067.8 5015.53,2067.8 5017.03,2066.3 5026.03,2066.3 v2(5027.53,2064.8)
  Layer 4 w3: v2(2870.84,2162.18) 3058.15,2162.18 3117.53,2102.8 3321.8,2102.8 3373.8,2154.8 J11.5@3376,2154.8 ; J11.5@3376,2157 3431.21,2101.8 3736.53,2101.8 3824.53,2013.8 4051.53,2013.8 v2@4077.53,2039.8
  Layer 6 w3: v2(2286.58,2161.8) 2314.53,2133.84 2314.53,1579.75 v2(2290.58,1555.8) ; v2(5027.53,2064.8) 5027.53,2002.54 5046.37,1983.7 5046.37,1508.74 5020,1482.36 5020,1276.87 5050.58,1246.29 5050.58,963.8 5043.58,956.8 5043.58,914.8 5040.62,911.84 5040.62,478.89 v2(5032.53,470.8)
  Bottom Layer w3: v2(2286.58,2161.8) v2@2873.58,2161.8
P1_4: J10.32 U3.K4 U17.1 | length 4512.9
  Top Layer w3: v4(2480.53,1493.8) 2480.53,1491.9 2485.89,1486.54 U3.K4@2485.89,1476.11
  Layer 5 w3: J10.32@2200,250 2241.21,208.8 2814.58,208.8 2860.58,254.8 4825.58,254.8 4890.08,319.3 4896.03,319.3 5008.12,431.38 v2(5028.18,431.38) ; v2(2308.58,1504.8) 2309.58,1505.8 2361.58,1505.8 2401.58,1465.8 2442.46,1465.8 2443.27,1466.61 2453.35,1466.61 v4(2480.53,1493.8)
  Layer 6 w3: J10.32@2191.58,231.8 2191.58,241.58 J10.32@2200,250 2248.58,298.58 2248.58,1016.8 2276.58,1044.8 2276.58,1261.45 2278.58,1263.45 2278.58,1340.6 2276.58,1342.6 2276.58,1472.8 v2(2308.58,1504.8)
  Bottom Layer w5: U17.1@4998.39,436 5024.33,436 v2@5028.53,431.8
P1_5: J10.34 U3.M4 U17.8 | length 4643.1
  Top Layer w3: v2(4628.58,155.8) 4808.58,335.8 4907.56,335.8 4930.08,358.32 5029.06,358.32 5051.58,380.84 5051.58,557.8 v2@5050.58,558.8
  Layer 3 w3: J10.34@2299.58,251.8 2299.58,256.8 2415.58,372.8 2415.58,435.8 2444.58,464.8 2444.58,653.95 2427.58,670.95 2427.58,1013.8 2438.58,1024.8 2438.58,1076.8 2416.34,1099.04 2416.34,1318.07 2434.32,1336.05 2434.32,1463.91 v4(2446.52,1476.11)
  Bottom Layer w3: J10.34@2300,250 2329.58,220.43 2329.58,218.8 2347.58,200.8 2347.58,90.8 2378.58,59.8 3100.58,59.8 3133.58,26.8 3260.58,26.8 3312.08,78.3 3312.08,137.3 3331.58,156.8 4627.58,156.8 v2(4628.58,155.8) ; U17.8@4998.39,554 5044.35,554 5047.42,557.08 5052.3,557.08 v2@5052.58,556.8
  other v2: 5051.58,558.8
P1_6: J10.38 S10.2 U3.N4 | length 2686.2
  Top Layer w3: v2(2068.58,1489.8) 2134.53,1489.8 2140.53,1483.8 2213.58,1483.8 2249.58,1519.8 2374.58,1519.8 2412.58,1481.8 2421.15,1481.8 U3.N4@2426.84,1476.11 ; v2(2088.58,488.8) 2088.58,432.8 2067.58,411.8 2067.58,306.3 2053.58,292.3 2053.58,186.8 2052.58,185.8 2052.58,112.8 2082.58,82.8 2412.58,82.8 2452.58,122.8 2452.58,167.8 2500,215.22 J10.38@2500,250
  Layer 6 w3: v2(2068.58,1489.8) 2068.58,1284.8 1976.58,1192.8 1976.58,974.8 2089.08,862.3 2089.08,683.56 2082.03,676.51 2082.03,497.1 2088.58,490.55 v2(2088.58,488.8)
  Bottom Layer w3: 2054.28,1682.5 S10.2@2054.28,1714.04 ; 2054.58,1681.8 2074.58,1661.8 2074.58,1624.8 2068.58,1618.8 v2(2068.58,1489.8)
P1_7: J10.40 S11.2 U3.M5 | length 1870.5
  Layer 4 w3: v2(2045.53,1486.8) 2045.53,1484.36 2050.42,1479.48 2050.42,1478.95 2052.54,1476.83 2315.54,1476.83 2335.95,1456.43 v4(2446.52,1456.43)
  Layer 6 w3: v4(2446.52,1456.43) 2427.58,1437.48 2427.58,1317.8 2411.58,1301.8 2411.58,828.8 2428.58,811.8 2428.58,492.8 2448.58,472.8 2448.58,401.43 2596.21,253.8 J10.40@2599.58,253.8
  Bottom Layer w3: v2(2045.53,1486.8) 2055.28,1496.55 S11.2@2055.28,1641.04
P2_0: J9.12 SW4.8 U3.K9 | length 3782.4
  Top Layer w3: v4(1791.53,1801.8) 1791.53,1881.8 SW4.8@1793.53,1883.8 ; U3.K9@2485.89,1377.69 2502.47,1377.69 2505.58,1380.8 v4(2505.58,1395.8)
  Layer 5 w3: v2(2078.58,821.8) 3128.58,821.8 3140.58,809.8 3324.58,809.8 3357.58,842.8 3880.21,842.8 J9.12@3927,796 3929.21,793.8 J9.12@3935.58,793.8
  Layer 4 w3: v2(1891.58,1417.8) 1901.58,1407.8 2000.58,1407.8 2025.7,1432.92 2026.58,1433.8 2037.08,1444.3 2401.93,1444.3 2429.17,1417.06 2454.32,1417.06 2463.58,1407.8 2463.58,1397.8 2477.58,1383.8 2493.58,1383.8 v4(2505.58,1395.8)
  Layer 6 w3: v4@1791.58,1801.8 1791.58,1725.8 1891.58,1625.8 v2(1891.58,1417.8) ; v2@1892.53,1417.8 1892.53,1416.84 1970.06,1339.32 1970.06,961.32 2078.58,852.8 v2(2078.58,821.8)
P2_1: J9.14 S5.1 U3.K7 | length 2367.7
  Layer 3 w3: v4(2485.89,1417.06) 2485.89,1441.11 2508.58,1463.8 2571.58,1463.8 2590.58,1444.8 2590.58,1350.5 2593.58,1347.5 2612.91,1347.5 2615.21,1349.8 2651.58,1349.8 2662.22,1339.16 2724.22,1339.16 2732.58,1330.8 2785.53,1330.8 2790.96,1336.22 2790.96,1338.67 2798.11,1345.82 v2(2798.11,1346.37) ; v2@2798.53,1346.8 2798.96,1346.37 2813.15,1346.37 2821.73,1337.8 3048.53,1337.8 3160.53,1225.8 3689.53,1225.8 3811.53,1347.8 ; 3811.53,1346.8 v2(3992.53,1346.8)
  Layer 4 w3: v2(3992.53,1346.8) 4001.53,1346.8 4025.58,1322.75 J9.14@4025.58,804.8
  Bottom Layer w3: S5.1@2783.7,1308 2783.7,1334.85 2788.6,1339.75 2789.88,1339.75 2796.5,1346.37 v2(2798.11,1346.37)
P2_3: J9.15 R63.1 U3.N8 | length 3251.6
  Top Layer w3: v2(2398.58,1405.8) 2400.58,1405.8 2402.58,1403.8 2420.41,1403.8 U3.N8@2426.84,1397.37 ; v2(4165.58,546.8) 4193.03,546.8 4198.16,551.92 4300.45,551.92 4311.69,540.69 R63.1@4311.69,482
  Layer 5 w3: v2(2413.58,490.8) 2428.58,505.8 2576.48,505.8 2599.98,529.3 2640.55,529.3 2659.36,510.48 2659.36,504.12 2678.18,485.3 2686.88,485.3 2693.03,491.45 2693.03,500.15 2667.62,525.55 2667.62,528.04 2669.38,529.8 3331.53,529.8 3400.53,598.8 4113.58,598.8 v2(4165.58,546.8)
  Layer 6 w3: v2(2398.58,1405.8) 2387.58,1394.8 2387.58,806.8 2396.58,797.8 2396.58,661.8 2413.58,644.8 v2(2413.58,490.8) ; J9.15@4126.58,692.8 4126.58,585.8 v2(4165.58,546.8)
P2_4: J9.17 U3.N7 U9.31 | length 4172.1
  Top Layer w3: v2(1025.14,1376.8) 1034.53,1386.18 1034.53,1526.75 1064.41,1556.63 U9.31@1089.26,1556.63 ; v2(2278.58,1018.8) 2413.73,1018.8 2444.73,987.8 2795.58,987.8 2913.58,869.8 3271.58,869.8 3387.58,753.8 4169.21,753.8 4224.21,698.8 J9.17@4231.58,698.8 ; v5(2414.58,1416.8) 2414.84,1417.06 U3.N7@2426.84,1417.06
  Layer 5 w3: v2(1025.14,1376.8) 1036.14,1365.8 1294.15,1365.8 1324.65,1396.3 1687.5,1396.3 1699.5,1384.3 2155.59,1384.3 2161.09,1389.8 2267.58,1389.8 2293.26,1415.47 v2(2293.26,1417.23) 2319.82,1443.8 2387.58,1443.8 v5(2414.58,1416.8)
  Layer 6 w3: v2(2278.58,1018.8) 2285.58,1025.8 2285.58,1246.8 2293.58,1254.8 2293.58,1416.91 v2(2293.26,1417.23)
P2_5: J9.19 U3.M7 U9.32 | length 4588.5
  Top Layer w3: v2(1071.43,1394.84) 1071.43,1427.85 1066.53,1432.76 1066.53,1463.33 1086.58,1483.38 1086.58,1538.48 1086.86,1538.48 U9.32@1089.26,1540.88 ; v2(2307.58,1458.3) 2308.08,1457.8 2391.58,1457.8 2418.56,1430.82 2422.52,1426.81 2436.77,1426.81 U3.M7@2446.52,1417.06
  Layer 3 w3: v2(1071.43,1394.84) 1086.39,1409.8 1411.07,1409.8 1417.07,1415.8 1530.58,1415.8 1620.58,1505.8 1954.58,1505.8 1988.08,1472.3 2093.72,1472.3 2097.72,1476.3 2203.36,1476.3 2221.86,1457.8 2307.08,1457.8 v2(2307.58,1458.3)
  Layer 5 w3: v2(2304.58,657.8) 2305.08,657.3 2315.08,657.3 2344.58,627.8 2499.02,627.8 2509.52,617.3 2595.08,617.3 2665.58,687.8 2718.58,687.8 2779.58,626.8 4257.8,626.8 J9.19@4327,696 4334.58,703.58 J9.19@4334.58,707.8
  Layer 6 w3: v2@2303.58,657.8 2330.58,684.8 2330.58,869.8 2294.58,905.8 2294.58,1206.8 2307.58,1219.8 v2(2307.58,1458.3)
P2_6: J9.18 U3.N6 U8.C1 | length 6010.9
  Top Layer w3: v2(2354.58,1472.8) 2390.78,1472.8 U3.N6@2426.84,1436.74
  Layer 3 w3: v2(2330.58,1227.8) 2354.58,1251.8 v2(2354.58,1472.8)
  Layer 5 w3: v2(2330.58,1227.8) 2387.58,1227.8 2409.58,1205.8 2543.58,1205.8 2556.58,1192.8 3037.58,1192.8 3048.58,1181.8 3568.14,1181.8 3593.14,1156.8 4571.58,1156.8 4582.58,1167.8 4863.58,1167.8 4897.58,1201.8 4921.58,1201.8 v2(4922.58,1202.8) ; J9.18@4227,796 4227,799.22 4263.58,835.8 4897.58,835.8 v2(4918.58,856.8)
  Layer 4 w3: v2(4918.58,856.8) 4918.58,866.8 4921.58,869.8 5170.58,869.8 5173.58,872.8 5173.58,878.04 5171.82,879.8 4920.34,879.8 4918.58,881.55 4918.58,890.8 4921.58,893.8 5169.82,893.8 5171.58,895.55 5171.58,901.8 5169.58,903.8 4922.58,903.8 4918.58,907.8 4918.58,913.8 4921.58,916.8 5166.58,916.8 5168.58,918.8 5168.58,924.8 5166.58,926.8 4921.58,926.8 4918.58,929.8 4918.58,937.8 4921.58,940.8 4960.53,940.8 ; v2@4923.58,1203.8 4923.58,1201.8 4951.58,1173.8 4951.58,1021.8 4918.58,988.8 4918.58,953.8 4920.58,951.8 4960.53,951.8 ; 4960.58,940.8 4962.58,942.8 4962.58,949.8 4960.58,951.8
  Bottom Layer w3: U8.C1@4914.75,1539 4914.85,1538.9 4914.96,1539 4925.33,1539 4935.53,1528.8 4935.53,1467.75 4931.58,1463.8 4931.58,1211.8 v2(4922.58,1202.8)
P2_7: J9.20 U3.M6 U8.D2 | length 6024
  Layer 5 w3: v4(2446.52,1436.74) 2462.63,1436.74 2472.58,1426.8 2472.58,1316.8 2561.58,1227.8 2635.58,1227.8 2636.58,1226.8 3920.53,1226.8 3924.53,1230.8 3924.53,1249.8 3927.53,1252.8 3936.53,1252.8 3939.53,1249.8 3939.53,1230.8 3943.53,1226.8 3961.58,1226.8 3981.58,1246.8 4368.58,1246.8 4395.58,1219.8 4872.58,1219.8 v2(4876.58,1215.8) ; J9.20@4327,796 4816.78,796 v2(4819.58,798.8)
  Layer 4 w3: v2(4819.58,798.8) 4446.58,798.8 4443.58,801.8 4443.58,810.8 4446.58,813.8 4848.58,813.8 4854.58,819.8 4854.58,882.8 4849.58,887.8 4447.58,887.8 4441.58,893.8 4441.58,899.8 4445.58,903.8 4849.58,903.8 4854.58,908.8 4854.58,917.8 4850.58,921.8 4578.58,921.8 4575.58,924.8 4575.58,936.8 4578.58,939.8 4846.58,939.8 4854.58,947.8 4854.58,1100.8 4876.58,1122.8 4876.58,1213.8 v2@4875.58,1214.8 ; v2(4876.58,1215.8) 4876.58,1457.8 4899.58,1480.8 v2(4899.58,1522.8)